# Altium PCB ALTIUM_lab07_1.PcbDoc
Units mil, origin at the board's own origin, x right, y up, seen from the top; angles counter-clockwise.
Board outline 7667.84 x 4954.88 mil, 2 copper layers (Top Layer, Top, Bottom Layer, Bottom); 13 components, 9 nets, 30 pads, 0 vias.
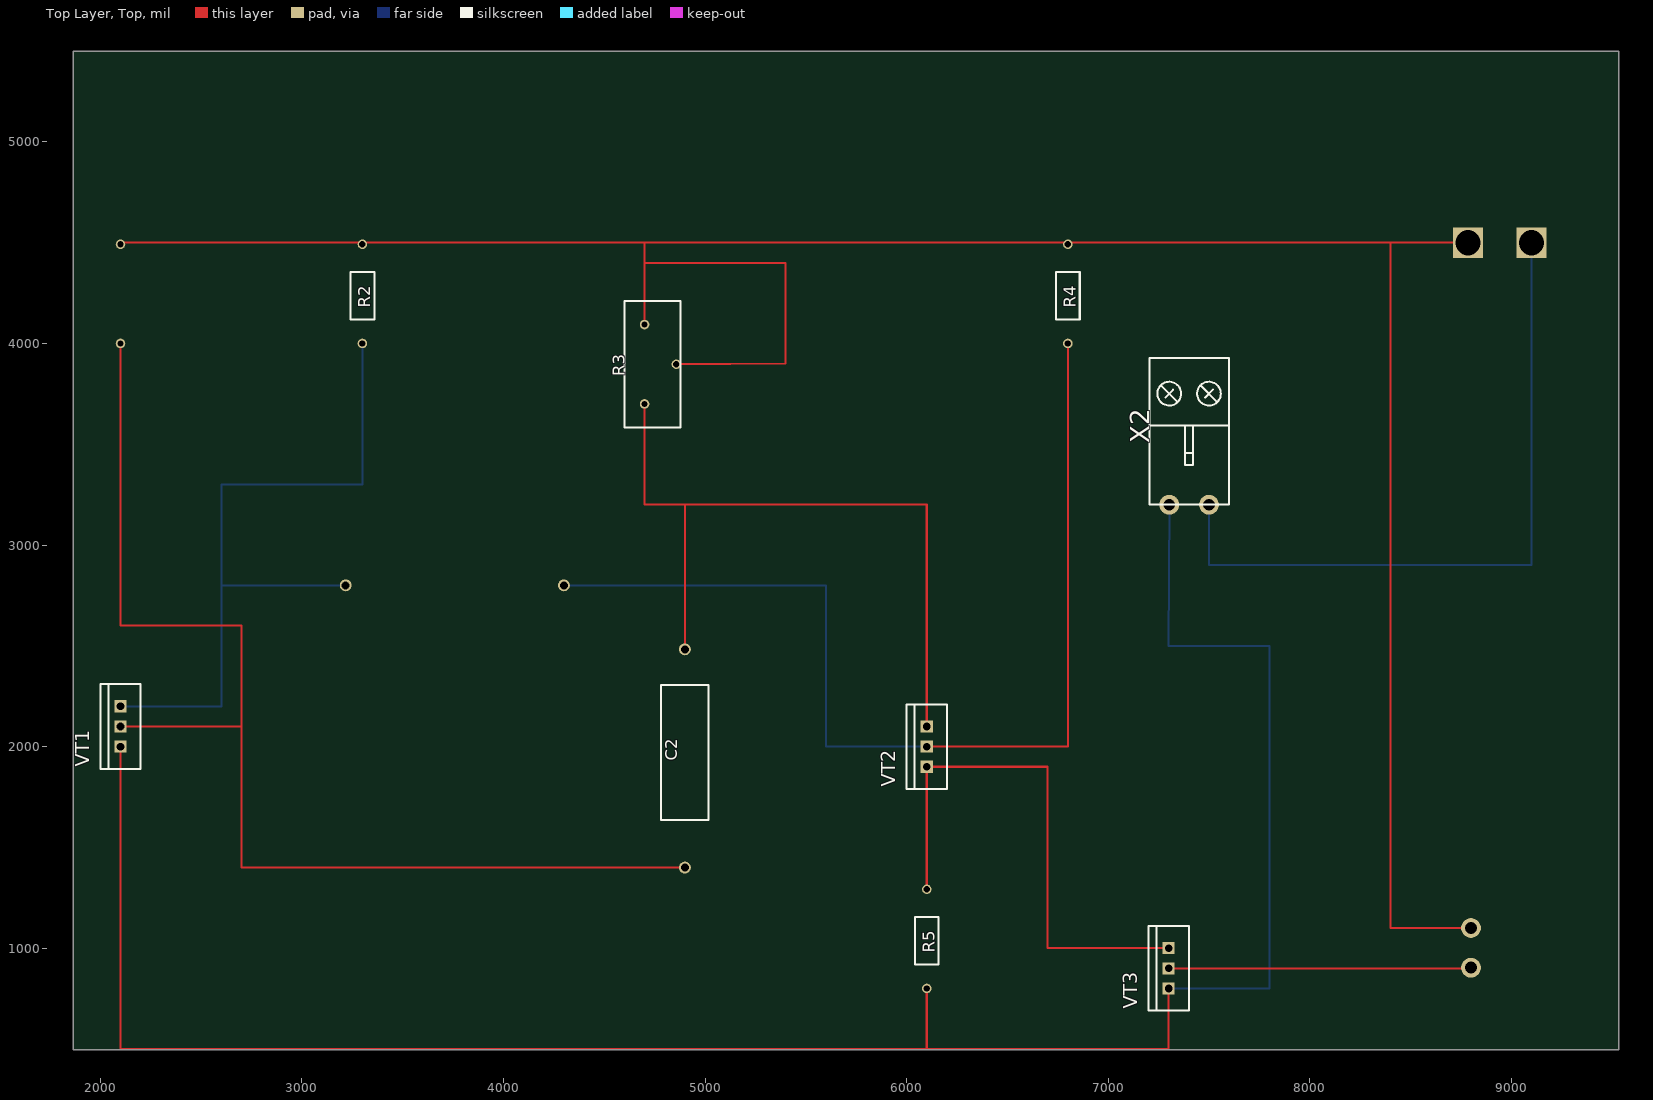
[diagram p0: Top Layer, Top view]
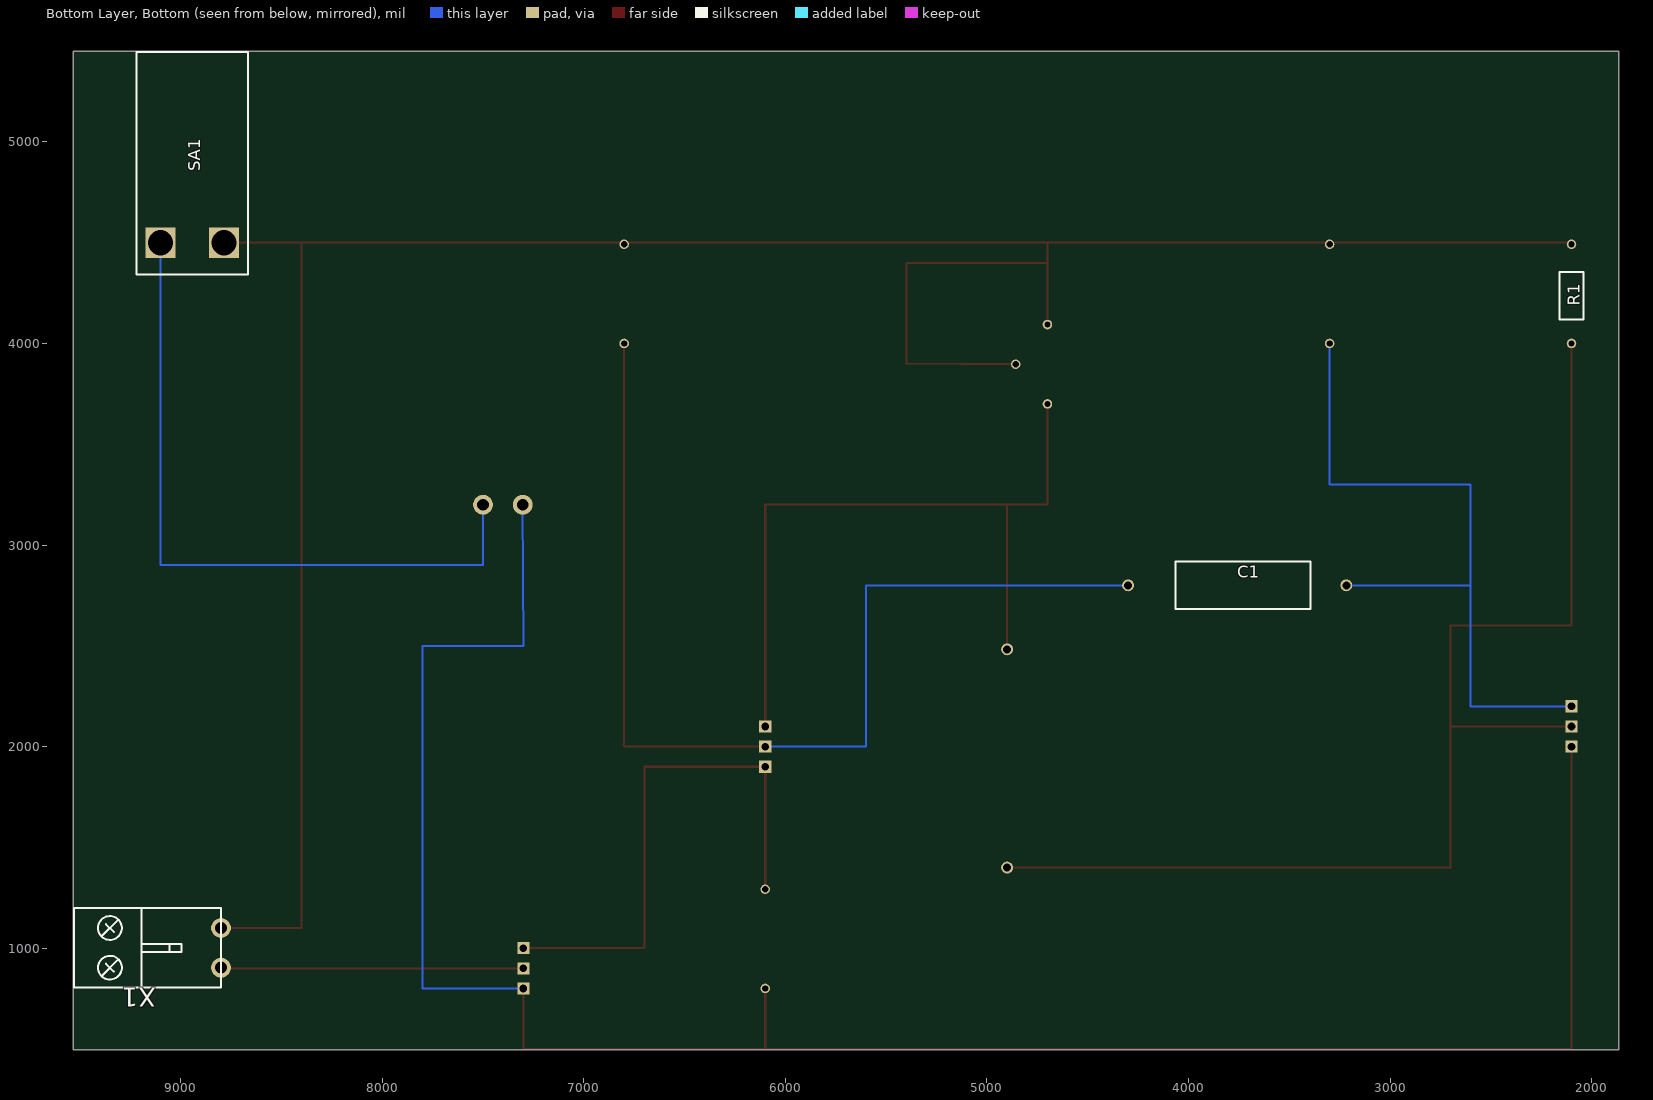
[diagram p1: Bottom Layer, Bottom view, seen from below]

## Layer stack, top to bottom
Top Solder, Top Mask: solder mask 0.4, Solder Resist, Dk 3.5
Top Layer, Top: signal copper 1.4
Dielectric 1: dielectric 12.6, FR-4, Dk 4.8
Bottom Layer, Bottom: signal copper 1.4
Bottom Solder, Bot Mask: solder mask 0.4, Solder Resist, Dk 3.5

## Board outline
1865.43,495 9533.27,495 9533.27,5449.88 1865.43,5449.88

## Design rules (kind name [scope] priority, off if disabled: settings)
Clearance [All] p1: gap=10 ignorepadtopadclearanceinfootprint=FALSE except(0: Arc-Hole Track-Hole SMDPad-Hole THPad-Hole Via-Hole Fill-Hole Poly-Hole Region-Hole Text-Hole; 12: Arc-Arc Arc-Track Arc-THPad Arc-Via Track-Track Track-THPad Track-Via THPad-THPad THPad-Via Via-Via)
PlaneClearance [All] p1: clearance=10
PolygonConnect [All] p1: connectstyle=Relief reliefconductorwidth=10 reliefentries=4 polygonreliefangle="90 Angle" airgapwidth=10
RoutingVias [All] p1: holewidth=28 width=50 viastyle="Through Hole" minholewidth=28 minwidth=50 maxholewidth=28 maxwidth=50
SolderMaskExpansion [All] p1: expansion=4
Width [All] p1: maxlimit=10 minlimit=10 preferedwidth=10
29 further rules are at their usual default settings.

## Components (designator, comment, footprint, x,y, rotation, side; value= is the part's Value field where it differs from the comment)
C1 "{Value}" "К50-29 (17Х6)" 4300,2800 r180 bottom
C2 "{Value}" "К50-29 (17Х6)" 4900,1400 r90 top
R1 "{Value}" МЛТ(0.125) 2100,4000 r90 bottom
R2 "{Value}" МЛТ(0.125) 3300,4000 r90 top
R3 "{Value}" СП3-38В 4700,3700 r90 top
R4 "{Value}" МЛТ(0.125) 6800,4000 r90 top
R5 "{Value}" МЛТ(0.125) 6100,800 r90 top
SA1 "{Value}" Т1 9100,4500 r90 bottom
VT1 "{Value}" КТ837 2100,2200 r90 top
VT2 "{Value}" КТ837 6100,2100 r90 top
VT3 "{Value}" КТ837 7300,1000 r90 top
X1 "" 2XR 8800,1100 r0 bottom
X2 "" 2XR 7500,3200 r90 top

## Footprints (in the part's own frame and the unit in brackets; to place one, negate y for a bottom-side part, rotate by r counter-clockwise, add the part's x,y. Pads: shape width x height; smd on the part's side, far side on the other; paste and mask are expansions set on the pad)
2XR [mm]
  round 2.5 hole 1.5: 1(0,0) 2(0,5)
  silkscreen extent 0,-2.5 18.5,7.5
"К50-29 (17Х6)" [mm]
  round 1.5 hole 1: 1(0,0) 2(27.5,0)
  silkscreen extent 6,-3 23,3
КТ837 [mil]
  rect 60x60 hole 38: 1(0,0) 2(-100,0) 3(-200,0)
  silkscreen extent -310,-100 110,100
МЛТ(0.125) [mm]
  round 1.2 hole 0.8: 1(0,0) 2(12.5,0)
  silkscreen extent 3,-1.5 9,1.5
СП3-38В [mm]
  round 1.2 hole 0.8: 1(0,0) 2(10,0) 3(5,-4)
  silkscreen extent -3,-4.5 13,2.5
Т1 [mm]
  rect 3.8x3.8 hole 3.2: 1(0,0) 2(0,-8)
  silkscreen extent -4,-11 24,3

## Nets (pads, with @x,y where several pads share a name; then routed paths per layer and width w, separated by ;. In a path a pad name is that pad's centre, name@x,y a point inside that pad or via, vN(x,y) a via of type N, cw(c..) or ccw(c..) an arc to the next point about the centre after c; other vN are vias at no path point)
NET00002: C1.1 R4.1 VT2.2 | length 5300
  Top Layer, Top w10: VT2.2 6800,2000 R4.1
  Bottom Layer, Bottom w10: C1.1 5600,2800 5600,2000 VT2.2
NET00004: C1.2 R2.1 VT1.1 | length 3617.3
  Bottom Layer, Bottom w10: VT1.1 2600,2200 2600,2800 ; C1.2 2600,2800 ; R2.1 3300,3300 2600,3300 2600,2800
NET00005: C2.2 R3.1 VT2.1 | length 3717.3
  Top Layer, Top w10: R3.1 4700,3200 4900,3200 ; C2.2 4900,3200 ; VT2.1 6100,3200 4900,3200
NET00012: R1.2 R2.2 R3.2 R3.3 R4.2 SA1.2 X1.1 | length 12657.5
  Top Layer, Top w10: R1.2 2100,4500 R2.2@3300,4500 ; R2.2 R2.2@3300,4500 ; R3.2 4700,4400 ; R3.3 5400,3900 5400,4400 4700,4400 ; R4.2 R4.2@6800,4500 ; SA1.2 8400,4500 ; X1.1 8400,1100 8400,4500 ; R2.2@3300,4500 4700,4500 ; 4700,4400 4700,4500 ; 4700,4500 R4.2@6800,4500 ; R4.2@6800,4500 8400,4500
NET00013: R5.1 VT1.3 VT3.3 X2.2 | length 10700
  Top Layer, Top w10: VT1.3 2100,500 6100,500 ; R5.1 6100,500 ; VT3.3 7300,500 6100,500
  Bottom Layer, Bottom w10: VT3.3 7800,800 7800,2500 7300,2500 X2.2
NET00015: SA1.1 X2.1 | length 3500
  Bottom Layer, Bottom w10: X2.1 7500,2900 9100,2900 SA1.1
NET00017: VT3.2 X1.2 | length 1503.1
  Top Layer, Top w10: VT3.2 8800,900 X1.2
NET00021: C2.1 R1.1 VT1.2 | length 6000
  Top Layer, Top w10: VT1.2 2700,2100 ; R1.1 2100,2600 2700,2600 2700,2100 ; C2.1 2700,1400 2700,2100
NET00022: R5.2 VT2.3 VT3.1 | length 2707.9
  Top Layer, Top w10: R5.2 VT2.3 6700,1900 6700,1000 VT3.1